# EAGLE board BLEbee-1_0_0-REV-B (EAGLE 6.4)
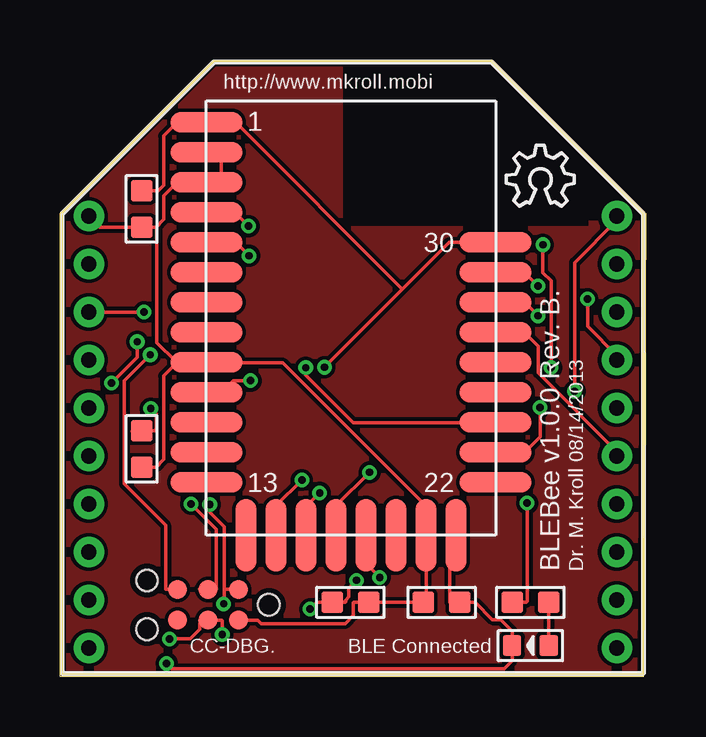
[diagram p0: board, top side]
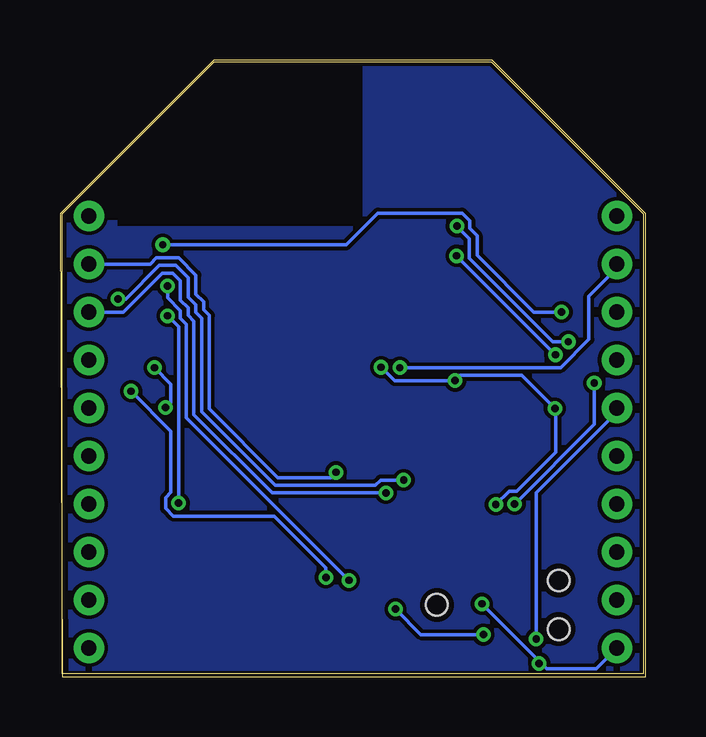
[diagram p1: board, bottom side, seen from below]

Size 24.4 x 25.7 mm. Coordinates in mm from the lower left corner, seen from the top.
Outline: 0,19.3 6.4,25.7 18,25.7 24.4,19.3 24.3,0 0,0 0,19.3
Copper layers (1*2*15*16): Top 0.035mm / dielectric 0.2mm / layer 2 0.0175mm / dielectric 1.1mm / layer 15 0.0175mm / dielectric 0.2mm / Bottom 0.035mm
Design rules "SeeedStudio_DRU_no_angle_20130527": minimum track width 6mil, minimum drill 12mil, track to track 6mil, track to pad 6mil, pad to pad 6mil, via to via 6mil, smd to smd 0mil, copper to edge 10mil, drill to drill 10mil, minimum pad ring 6mil, minimum via ring 6mil, stop-mask expansion 2mil, vias tented up to drill 25mil, thermal gap 10mil
tRestrict: area 11.8,18.8 to 22,25.7
bRestrict: area 11.8,18.8 to 22,25.7

## Footprints (pad centres in the part's own frame; a part is rotated, then mirrored left to right if it is on the bottom)
C0603 = smd 0.889 x 0.889: 1 -0.762,0; 2 0.762,0
LED0603 = smd 0.762 x 0.889: + -0.762,0; - 0.762,0
TC2030-MCP-NL = smd 0.787 x 0.787: 1 1.27,-0.635; 2 1.27,0.635; 3 2.54,-0.635; 4 2.54,0.635; 5 3.81,-0.635; 6 3.81,0.635 | hole 0.889: 0,0; 5.08,-1.016; 5.08,1.016
R0603 = smd 0.889 x 0.889: 1 -0.762,0; 2 0.762,0
BLE112-A = smd 3 x 0.85: AVDD1 -6.05,6.9; AVDD2 -6.05,5.65; GND1 -6.05,8.15; GND2 -6.05,-3.1; GND4 6,3.15; P0_0 6,0.65; P0_1 6,-0.6; P0_2 6,-1.85; P0_3 6,-3.1; P0_4 6,-4.35; P0_5 6,-5.6; P0_6 6,-6.85; P1_5 -6.05,-6.85; P1_6 -6.05,-0.6; P1_7 -6.05,0.65; P2_0 -6.05,1.9; P2_1 -6.05,3.15; P2_2 -6.05,4.4; RESET 6,1.9; USB+ -6.05,-4.35; USB- -6.05,-5.6; VDD_USB -6.05,-1.85 | smd 0.85 x 3: DVDD 3.1,-9.05; GND3 4.35,-9.05; P0_7 1.85,-9.05; P1_0 0.6,-9.05; P1_1 -0.65,-9.05; P1_2 -1.9,-9.05; P1_3 -3.15,-9.05; P1_4 -4.4,-9.05
MODULE_20P-DIP-2.0-W/-SILK = drill 0.635 pad 1.27: 1 -11,9; 2 -11,7; 3 -11,5; 4 -11,3; 5 -11,1; 6 -11,-1; 7 -11,-3; 8 -11,-5; 9 -11,-7; 10 -11,-9; 11 11,-9; 12 11,-7; 13 11,-5; 14 11,-3; 15 11,-1; 16 11,1; 17 11,3; 18 11,5; 19 11,7; 20 11,9

## Placement (x,y rotation side)
C1  100n  [C0603]  3.4,9.5 90 top
C2  100n  [C0603]  15.9,3.1 0 top
C3  100n  [C0603]  3.4,19.5 90 top
D1  CONN  [LED0603]  19.6,1.3 180 top
J1  [TC2030-MCP-NL]  8.7,3 180 top
LOGO1  LOGO-OSHW-6MILX0100-NT  [OSHW_6X100_NOTEXT]  18.6,19.6 0 top
R1  10k  [R0603]  12.1,3.1 0 top
R2  470  [R0603]  19.6,3.1 180 top
U1  BLE112-A  [BLE112-A]  12.15,14.95 0 top
U3  [MODULE_20P-DIP-2.0-W/-SILK]  12.2,10.2 0 top

## Library data of the parts
C1-C3 D1 R1 R2 = OPL
J1 = Tag-Connect
LOGO1 = Logo
U1 = sf-bluegiga
U3 = BLEbee-1_0_0-REV-B

## Nets
3.3V: C1.1 C2.1 C3.1 J1.2 R1.2 U1.AVDD1 U1.AVDD2 U1.DVDD U1.VDD_USB U3.1
DI0: U1.P1_0 U3.20
DI1: U1.P1_1 U3.19
DI2: U1.P1_2 U3.18
DI3: U1.P1_3 U3.17
GND: C1.2 C2.2 C3.2 D1.- J1.1 U1.GND1 U1.GND2 U1.GND3 U1.GND4 U3.10
N$1: D1.+ R2.1
P0_0: R2.2 U1.P0_0
P0_1: U1.P0_1 U3.15
P0_4/TX: U1.P0_4 U3.2
P0_5/RX: U1.P0_5 U3.3
P2_1: J1.5 U1.P2_1
P2_2: J1.3 U1.P2_2
RESET_BLE: J1.4 R1.1 U1.RESET U3.5

## Tracks (layer width: path | path; a pad name or v marks a point on that pad's centre or on a via)
3.3V
  Top 0.152: J1.2 8.24,2.36 8.38,2.22 11.88,2.22 12.22,2.56 12.22,3.08 12.24,3.1 R1.2 C2.1 15.26,3.1 15.26,5.88 15.32,5.94 15.32,6.22 15.28,6.26 15.26,6.26 U1.DVDD 15.26,6.32 15.26,7.1 9.28,13.08 6.76,13.08 6.74,13.1 U1.VDD_USB | U1.VDD_USB 5.46,13.1 5.44,13.08 4.86,13.08 4.32,12.54 4.32,9.06 4,8.74 3.42,8.74 3.36,8.8 3.08,8.8 3.04,8.76 3.04,8.74 C1.1 | U3.1 1.66,18.74 C3.1 3.46,18.74 4,18.74 | 4,18.74 4.32,19.06 4.32,20.04 4.86,20.58 5.44,20.58 5.46,20.6 U1.AVDD2 6.7,20.6 6.72,20.62 6.72,21.84 6.7,21.86 6.12,21.86 6.06,21.92 5.78,21.92 5.74,21.88 5.74,21.86 U1.AVDD1 | U1.VDD_USB 4.82,13.14 4.04,13.92 4.04,18.68 4,18.74
DI0  (via drill 0.3)
  Top 0.152: U3.20 23.2,19.02 21.44,17.26 v21.44,11.9 | v13.32,4.14 12.78,4.68 12.78,5.24 12.76,5.26 U1.P1_0
  Bottom 0.152: v21.44,11.9 19.78,10.24 19.78,7.68 20,7.46 20,7.02 19.68,6.7 15.48,6.7 13.32,4.54 v13.32,4.14
DI1  (via drill 0.3)
  Top 0.152: v12.9,8.52 11.52,7.14 11.52,6.56 11.5,6.54 U1.P1_1
  Bottom 0.152: U3.19 20.64,17.2 20.38,17.46 19.46,17.46 18.74,16.74 18.74,15.94 18.42,15.62 18.42,15.3 18.18,15.06 18.18,11.16 15.32,8.3 13.12,8.3 v12.9,8.52
DI2  (via drill 0.3)
  Top 0.152: v10.82,7.66 10.28,7.12 10.28,6.56 10.26,6.54 U1.P1_2
  Bottom 0.152: U3.18 21.76,15.2 20.14,16.82 19.7,16.82 19.38,16.5 19.38,15.7 19.06,15.38 19.06,15.06 18.82,14.82 18.82,10.92 15.56,7.66 v10.82,7.66
DI3  (via drill 0.3)
  Top 0.152: U3.17 23.2,13.38 21.98,14.6 v21.98,15.74 | v10.08,8.2 9.02,7.14 9.02,6.56 9,6.54 U1.P1_3
  Bottom 0.152: v21.98,15.74 21.66,15.74 20.26,17.14 19.58,17.14 19.06,16.62 19.06,15.82 18.74,15.5 18.74,15.18 18.5,14.94 18.5,11.04 15.44,7.98 11.26,7.98 11.04,8.2 v10.08,8.2
GND  (via drill 0.3)
  Top 0.152: U1.GND3 16.5,5.26 16.24,5 16.24,3.1 C2.2 17.3,3.1 18.02,2.38 18.36,2.38 18.84,1.9 D1.- 18.84,1.24 18.84,0.66 18.52,0.34 4.66,0.34 v4.44,0.56 | v6.82,3.04 6.84,3.06 6.84,3.62 6.86,3.64 | 6.86,3.64 J1.1 | C3.2 3.04,20.26 3.04,20.24 3.08,20.2 3.36,20.2 3.42,20.26 4.1,20.26 4.32,20.48 4.32,22.54 4.86,23.08 5.44,23.08 5.46,23.1 U1.GND1 7.32,23.1 14.27,16.15 | v3.78,11.18 4,10.96 4,10.28 3.98,10.26 3.42,10.26 3.38,10.22 3.02,10.22 3,10.24 3,10.26 C1.2 | v7.94,12.34 7.22,12.34 6.74,11.86 U1.GND2 | U1.GND4 16.22,18.1 14.27,16.15 | v11.02,12.9 14.27,16.15 | v6.24,7.18 6.24,6.86 6.84,6.26 6.84,3.7 6.86,3.64
  Bottom 0.152: U3.10 2.06,0.34 4.12,0.34 4.39,0.61 | v6.82,3.04 4.39,0.61 | v4.44,0.56 4.39,0.61 | v11.02,12.9 10.46,12.34 v7.94,12.34 7.72,12.56 5.16,12.56 v3.78,11.18 3.74,11.12 3.74,9.36 5.36,7.74 5.68,7.74 v6.24,7.18
N$1
  Top 0.152: D1.+ 20.36,3.08 20.34,3.1 20.02,3.1 20.02,3.12 20.06,3.16 20.3,3.16 R2.1
N$2
  pour Top: 0.1,19.3 6.4,25.6 11.8,25.6 11.8,18.9 24.3,18.9 24.3,0.1 0.1,0.1
N$3
  pour Bottom: 0.1,19.3 6.4,25.6 11.8,25.6 11.8,18.9 24.3,18.9 24.3,0.2 0.1,0.2
P0_0  (via drill 0.3)
  Top 0.152: R2.2 19.42,3.1 19.46,3.14 v19.46,7.24 | v19.92,15.04 19.38,15.58 18.8,15.58 18.78,15.6 U1.P0_0
  Bottom 0.152: v19.46,7.24 19.46,14.58 v19.92,15.04
P0_1
  Top 0.152: U3.15 23.2,9.38 19.92,12.66 19.92,13.78 19.36,14.34 18.8,14.34 18.78,14.36 U1.P0_1
P0_4/TX  (via drill 0.3)
  Top 0.152: v10.24,12.88 10.24,12.56 12.22,10.58 17.5,10.58 17.52,10.6 U1.P0_4
  Bottom 0.152: U3.2 1.2,17.02 2.36,15.86 2.36,14.06 3.54,12.88 v10.24,12.88
P0_5/RX  (via drill 0.3)
  Top 0.152: v3.5,15.2 U3.3 | v20.12,18 20.12,16.84 20.46,16.5 v20.46,12.88 | v20,11.22 20,10 19.38,9.38 18.8,9.38 18.78,9.36 U1.P0_5
  Bottom 0.152: v3.5,15.2 4.66,15.2 7.02,17.56 7.02,18.38 7.32,18.68 7.32,19 7.64,19.32 11.16,19.32 12.48,18 v20.12,18 | v20.46,12.88 19.78,12.2 19.78,11.44 v20,11.22
P2_1  (via drill 0.3)
  Top 0.152: v3.76,13.42 2.68,12.34 2.68,8.04 4.4,6.32 4.4,3.64 J1.5 | v7.88,17.54 7.34,18.08 6.76,18.08 6.74,18.1 U1.P2_1
  Bottom 0.152: v7.88,17.54 v3.76,13.42
P2_2  (via drill 0.3)
  Top 0.152: v5.46,7.2 6.52,6.14 6.52,3.64 6.18,3.64 6.12,3.7 5.86,3.7 5.82,3.66 5.82,3.64 J1.3 | v2.14,12.24 3.22,13.32 v3.22,13.96 | v7.86,18.78 7.3,19.34 6.76,19.34 6.74,19.36 U1.P2_2
  Bottom 0.152: v5.46,7.2 2.14,10.52 v2.14,12.24 | v3.22,13.96 3.86,13.96 7.34,17.44 7.34,18.26 v7.86,18.78
RESET_BLE  (via drill 0.3)
  Top 0.152: v6.76,1.76 6.76,2.34 6.74,2.36 6.18,2.36 6.12,2.3 5.86,2.3 5.82,2.34 5.82,2.36 J1.4 5.82,2.24 5.82,1.98 5.42,1.58 v4.56,1.58 | v10.42,2.82 10.7,3.1 R1.1 11.88,3.1 11.9,3.12 11.9,3.2 12.04,3.34 12.04,3.7 v12.36,4.02 | v19.92,16.28 19.34,16.86 U1.RESET
  Bottom 0.152: v6.76,1.76 9.36,1.76 v10.42,2.82 | U3.5 1.2,11.02 4.56,7.66 v4.56,1.58 | v19.92,16.28 19.92,15.8 19.38,15.26 19.38,14.94 19.14,14.7 19.14,10.8 v12.36,4.02

## Text on the board
tNames: http://www.mkroll.mobi | BLEBee v1.0.0 Rev. B. | Dr. M. Kroll 08/14/2013 | BLE Connected | CC-DBG.